# Altium PCB PCB_GTIL_WIFI.PcbDoc
Units mil, origin at the board's own origin, x right, y up, seen from the top; angles counter-clockwise.
Board outline 1300 x 765 mil, 2 copper layers (Top Layer, Bottom Layer); 11 components, 16 nets, 61 pads, 4 vias.
Unrouted connection lines stored in the file: 10.
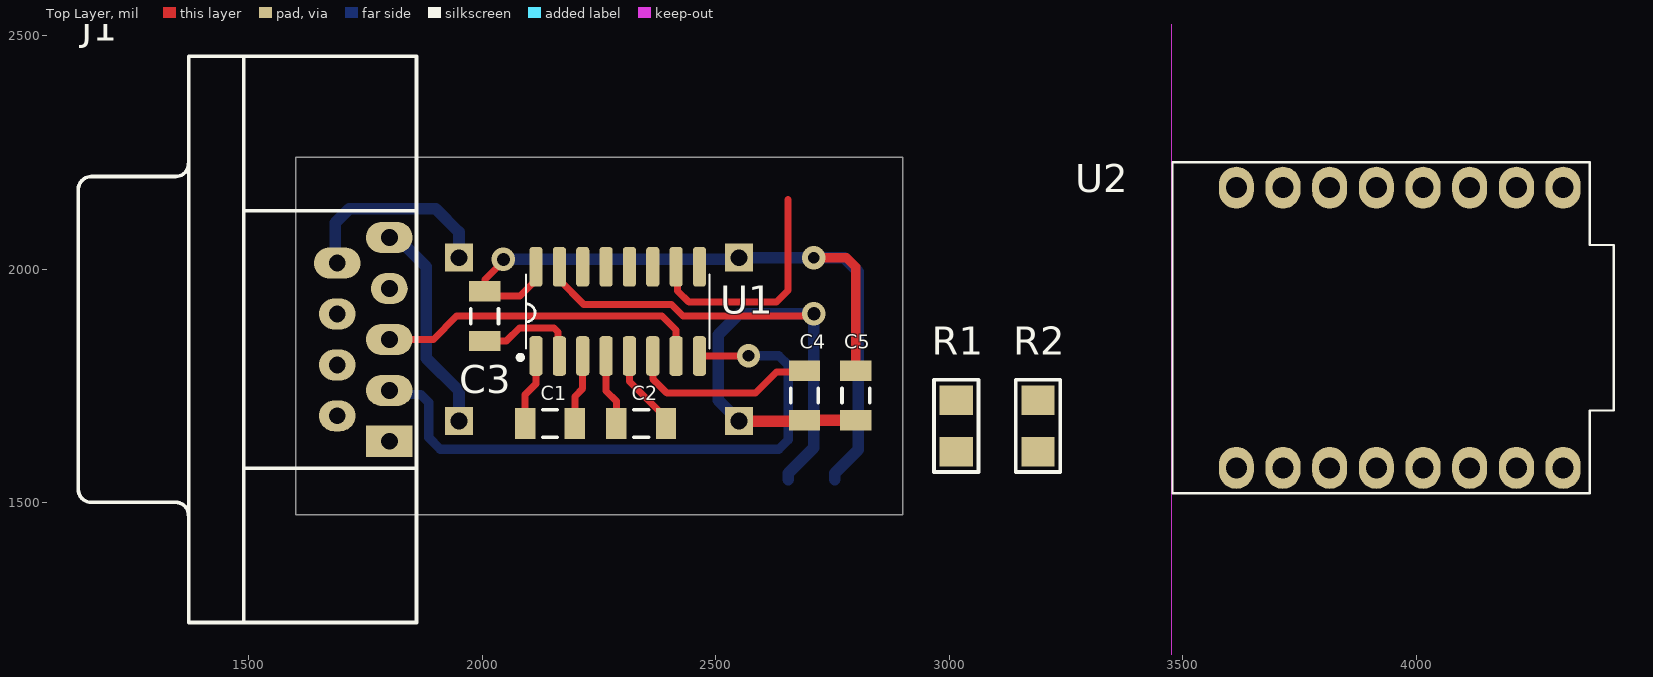
[diagram p0: Top Layer view]
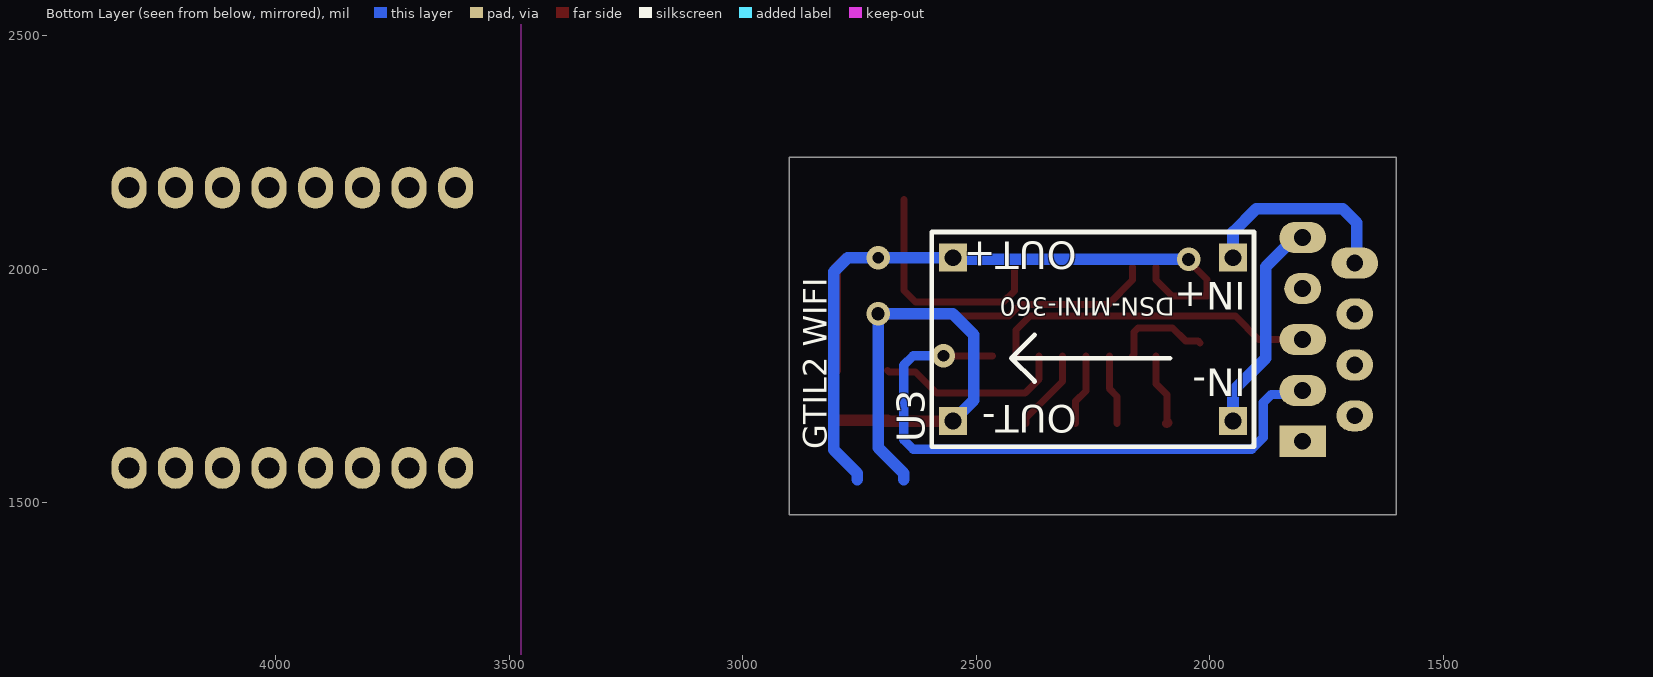
[diagram p1: Bottom Layer view, seen from below]

## Layer stack, top to bottom
Top Solder: solder mask 0.4, Solder Resist, Dk 3.5
Top Layer: signal copper 1.4
Dielectric 1: dielectric 12.6, FR-4, Dk 4.8
Bottom Layer: signal copper 1.4
Bottom Solder: solder mask 0.4, Solder Resist, Dk 3.5

## Board outline
1600,1475 1600,2240 2900,2240 2900,1475
cut-out: 985,2605 3475,2605 3475,990 3480,985 975,985

## Design rules (kind name [scope] priority, off if disabled: settings)
Clearance [All] p1: gap=10 ignorepadtopadclearanceinfootprint=FALSE except(0: Arc-Hole Track-Hole SMDPad-Hole THPad-Hole Via-Hole Fill-Hole Poly-Hole Region-Hole Text-Hole; 20: SMDPad-Poly Via-Poly)
PlaneClearance [All] p1: clearance=50
PolygonConnect [All] p1: thpad.connectstyle=NoConnect thpad.reliefconductorwidth=10 thpad.reliefentries=4 thpad.polygonreliefangle="90 Angle" thpad.airgapwidth=35 smdpad.connectstyle=NoConnect smdpad.reliefconductorwidth=10 smdpad.reliefentries=4 smdpad.polygonreliefangle="90 Angle" smdpad.airgapwidth=100 via.connectstyle=NoConnect via.reliefconductorwidth=10 via.reliefentries=4 via.polygonreliefangle="90 Angle" via.airgapwidth=50
RoomDefinition Schematic [InComponentClass('Schematic')] p1: confinementstyle=ConfineIn formatcopy=TRUE lockcomponents=FALSE outline 720,770 4620,770 4620,2820 720,2820
RoutingVias [All] p1: holewidth=28 width=10 viastyle="Through Hole" minholewidth=28 minwidth=10 maxholewidth=28 maxwidth=10
SolderMaskExpansion [All] p1: expansion=20.47 istentingtop=FALSE soldermaskfromhole=TRUE
Width [All] p1: maxlimit=25 minlimit=12 preferedwidth=20
29 further rules are at their usual default settings.

## Components (designator, comment, footprint, x,y, rotation, side; value= is the part's Value field where it differs from the comment)
C1 "Cap Semi" C1206 2145,1670 r180 top value=100pF
C2 "Cap Semi" C1206 2340,1670 r0 top value=100pF
C3 "Cap Semi" C1206 2005,1900 r270 top value=100pF
C4 "Cap Semi" C1206 2690,1730 r270 top value=100pF
C5 "Cap Semi" C1206 2800,1730 r90 top value=100pF
J1 "COM9-MALE" DSUB1.385-2H9 1370.98,1850 r90 top locked
R1 "30" "RESC-1206 (3216)" 3015,1665 r90 top value=0R
R2 "330" "RESC-1206 (3216)" 3190,1665 r90 top value=0R
U1 "MAX 232" SOIC-16 2290,1910 r0 top
U2 "ESP32" MODULE_ESP32-C3_SUPERMINI 3925,1875 r270 top
U3 "DSN-MINI" PCBComponent_1 2250,1850 r0 bottom

## Footprints (in the part's own frame and the unit in brackets; to place one, negate y for a bottom-side part, rotate by r counter-clockwise, add the part's x,y. Pads: shape width x height; smd on the part's side, far side on the other; paste and mask are expansions set on the pad)
C1206 [mm] "Chip Capacitor, Body 3.2x1.6mm, IPC High Density"
  rect 1.1x1.7 smd: 1(-1.35,0) 2(1.35,0)
  silkscreen extent -0.4,-0.75 0.4,0.75, body extent -1.7,-0.9 1.7,0.9, height 1.3
DSUB1.385-2H9 [mm] "Connector; D Subminiature; 9 Position; Right Angle; Pitch 1.385 mm"
  rect 1.69x2.54 hole 0.914: 1(-5.54,-10.92)
  oval 1.69x2.54 hole 0.914: 2(-2.77,-10.92) 3(0,-10.92) 5(5.54,-10.92) 9(4.155,-8.08)
  oval 1.69x2 hole 0.914: 4(2.77,-10.92) 6(-4.155,-8.08) 7(-1.385,-8.08) 8(1.385,-8.08)
  rect 1.7x1.1 on Top Overlay: 10(-12.495,-9.5) ""(12.495,-9.5)
  silkscreen extent -15.4,-12.4 15.4,6
MODULE_ESP32-C3_SUPERMINI [mil]
  oval 90x75 hole 45: 0(300,-310.24) 1(300,-210.24) 2(300,-110.24) 3(300,-10.24) 3.3(300,189.76) 4(300,89.76) 5(-300,389.76) 5V(300,389.76) 6(-300,289.76) 7(-300,189.76) 8(-300,89.76) 9(-300,-10.24) 10(-300,-110.24) 20(-300,-210.24) 21(-300,-310.24) G(300,289.76)
  silkscreen extent -354,-447 354,498
PCBComponent_1 [mil]
  rect 60x60 hole 36 paste+0 mask+2: 1(-300,-175) 2(-300,175) 3(300,-175) 4(300,175)
  silkscreen extent -345,-230 345,230
"RESC-1206 (3216)" [mm] "Resistor, Chip; 3.10 mm L X 1.60 mm W X 0.90 mm H body"
  rect 1.6x1.8 smd: 1(-1.4,0) 2(1.4,0)
  silkscreen extent -2.51,-1.21 2.51,1.21, body extent -1.55,-0.8 1.55,0.8, height 0.9
SOIC-16 [mm] "Small Outline IC (SOIC), 1.27 mm pitch; 16 pin, 9.90 mm L X 4.00 mm W X 1.75 mm H body"
  rrect50% 0.72x2.16 smd: 1(-4.445,-2.425) 2(-3.175,-2.425) 3(-1.905,-2.425) 4(-0.635,-2.425) 5(0.635,-2.425) 6(1.905,-2.425) 7(3.175,-2.425) 8(4.445,-2.425) 9(4.445,2.425) 10(3.175,2.425) 11(1.905,2.425) 12(0.635,2.425) 13(-0.635,2.425) 14(-1.905,2.425) 15(-3.175,2.425) 16(-4.445,2.425)
  silkscreen extent -5.42,-2.62 4.98,2, body extent -4.95,-3 4.95,3, height 1.26

## Part data
C1 C2 C3 C4 C5: "Capacitor (Semiconductor SIM Model)", LatestRevisionDate=29-May-2009, LatestRevisionNote="IPC-7351 Footprint Added.", PackageDescription="Chip Capacitor", PackageReference=C1206, Published=8-Jun-2000, Publisher="Altium Limited"
J1: library part "D Connector 9", "Receptacle Assembly, 9 Position, Right Angle", PackageDocument=O, DatasheetDocument=1-Sep-1999, Gender=Receptacle, LatestRevisionDate=17-Jul-2002, LatestRevisionNote="Re-released for DXP Platform.", Orientation="Right Angle", PackageReference=788750, Positions=9, Published=15-Jun-2001, Publisher="Altium Limited"
R1 R2: library part RC1206JR-070RL, "RES SMD 0.0 OHM JUMPER 1/4W 1206", Category=RESISTOR, CompanyID=VT-01082, MPN=RC1206JR-070RL, Solder=SMT
U1: library part "MAX3232CDRE4, MAX3232CDR", "IC DRVR/RCVR MULTCH RS232 16SOIC", Category=IC, MPN="MAX3232CDRE4, MAX3232CDR", Solder=SMT
U2: library part ESP32-C3_SUPERMINI, "Super tiny ESP32-C3 board", Package=Package, Check_prices=https://www.snapeda.com/parts/ESP32-C3%20SuperMini/Espressif+Systems/view-part/?ref=eda, MF="Espressif Systems", MP="ESP32-C3 SuperMini", SnapEDA_Link=https://www.snapeda.com/parts/ESP32-C3%20SuperMini/Espressif+Systems/view-part/?ref=snap

## Via types
v1: diameter 50, hole 28, Top Layer to Bottom Layer, 2 vias
v2: diameter 50, hole 25, Top Layer to Bottom Layer, 2 vias

## Nets (pads, with @x,y where several pads share a name; then routed paths per layer and width w, separated by ;. In a path a pad name is that pad's centre, name@x,y a point inside that pad or via, vN(x,y) a via of type N, cw(c..) or ccw(c..) an arc to the next point about the centre after c; other vN are vias at no path point)
+5: R1.1 U2.5V U3.3
GND: C4.2 C5.1 U1.11 U1.13 U1.15 U2.G U3.4 | length 1652.4
  Top Layer w15: U1.15 2165,1977.13 2217.13,1925 2405,1925 2430,1900 2705,1900 v1(2710,1905)
  Top Layer w25: U3.4@2570,1674.53 C4.2@2700,1674.53 ; C4.2 C5.1
  Bottom Layer w25: U3.4 2505,1720 2505,1860 2550,1905 v1(2710,1905) 2710,1618.13 2655,1563.13 2655,1550
NetC1_1: C1.1 U1.3 | length 151.5
  Top Layer w15: C1.1 2198.15,1728.15 2215,1745 U1.3
NetC1_2: C1.2 U1.1 | length 156.7
  Top Layer w15: C1.2 2091.85,1731.85 2115,1755 U1.1
  Top Layer w20: C1.2@2090,1671.85 C1.2
NetC2_1: C2.1 U1.4 | length 153.6
  Top Layer w15: U1.4 2265,1740 2286.85,1718.15 C2.1
NetC2_2: C2.2 U1.5 | length 176.9
  Top Layer w15: U1.5 2315,1759.96 2393.15,1681.81 C2.2
NetC3_1: C3.1 C5.2 R1.2 U1.16 | length 1807.5
  Top Layer w15: v1(2045,2021.41) 2045,2017.82 2005.69,1978.52 2005.69,1943.84 2005,1943.15 2081.02,1943.15 2115,1977.13 U1.16
  Top Layer w20: 2570,2024.53 2570.24,2024.76 ; v2@2709.76,2024.76 v2(2710,2025) 2780,2025 2800,2005 C5.2
  Bottom Layer w15: 2546.88,2021.41 2550,2024.53
  Bottom Layer w25: v1(2045,2021.41) 2546.88,2021.41 ; 2550,2025 v2(2710,2025) 2775,2025 2805,1995 2805,1613.57 2755,1563.57 2755,1550
NetC3_2: C3.2 U1.2 | length 211.1
  Top Layer w15: C3.2@2020.33,1842.18 2025.33,1847.18 2052.18,1847.18 2079.55,1874.55 2153.08,1874.55 2161.87,1865.76 2161.87,1817.66 U1.2
NetC4_1: C4.1 U1.6 | length 406.9
  Top Layer w15: U1.6 2365,1765 2395,1735 2585,1735 2630,1780 2686.85,1780 C4.1
NetR2_1: R2.1 U1.9
RS232_RXD: J1.3 U1.7 | length 702.7
  Top Layer w15: J1.3 1895,1850 1945,1900 2385,1900 2415,1870 U1.7
RS232_TXD: J1.2 U1.8 | length 1322
  Top Layer w15: U1.8 2465.47,1815 v2@2575,1815
  Bottom Layer w20: J1.2 1809.81,1732.04 1867.96,1732.04 1885,1715 1885,1640 1910,1615 2635,1615 2655,1635 2655,1795 2635,1815 v2(2570,1815)
TTL_RXD: R2.2 U2.7
TTL_TXD: U1.10 U2.6 | length 504.9
  Top Layer w15: U1.10 2418.02,2002.46 2418.02,1954.13 2442.14,1930 2630,1930 2655,1955 2655,2150
Vin+: J1.9 U3.1 | length 441.3
  Bottom Layer w25: J1.9 1685,2017.68 1685,2100 1715,2130 1900,2130 1950,2080 U3.1
Vin-: J1.5 U3.2 | length 464.7
  Bottom Layer w25: J1.5 1817.64,2068.11 1880,2005.75 1880,1810 1950,1740 U3.2
pads on no net: J1. J1.1 J1.4 J1.6 J1.7 J1.8 J1.10 U1.12 U1.14 U2.0 U2.1 U2.2 U2.3 U2.3.3 U2.4 U2.5 U2.8 U2.9 U2.10 U2.20 U2.21

## Polygon pours and split planes (outlines as drawn)
no net on Top Courtyard "NONET_L-01_P-001" (solid, pour order 10): 1605,2230 2905,2230 2905,1475 2900,1470 2890,1480 1600,1480

## Silkscreen, mask and mechanical layers (free items; w line width, h text height)
Bottom Overlay:
  text "GTIL2 WIFI" at 2820,1615 h50 r270

## Text inside footprints (layer, text, board x,y; h text height)
U3: Bottom Overlay "OUT+" at 2285,2059.53 h59.05 r180; Bottom Overlay "DSN-MINI-360" at 2075,1939.68 h39.37 r180; Bottom Overlay "OUT-" at 2285,1709.53 h59.05 r180; Bottom Overlay "IN-" at 1923,1787 h59.05 r180; Bottom Overlay "IN+" at 1923,1972 h59.05 r180